# Altium PCB Control_Board_Model_C_Rigid_Flex_Flipped.PcbDoc (part 2 of 8)
Units mil, origin at the board's own origin, x right, y up, seen from the top; angles counter-clockwise.
Board outline 3417.32 x 2110.24 mil, 6 copper layers (1-Sig/GND, 2-Sig, 3-GND, 4-Sig/Pwr, 5-Sig, 6-Sig/GND), stack 39.291 mil thick; 418 components, 342 nets, 1601 pads, 44 vias.
Unrouted connection lines stored in the file: 13.
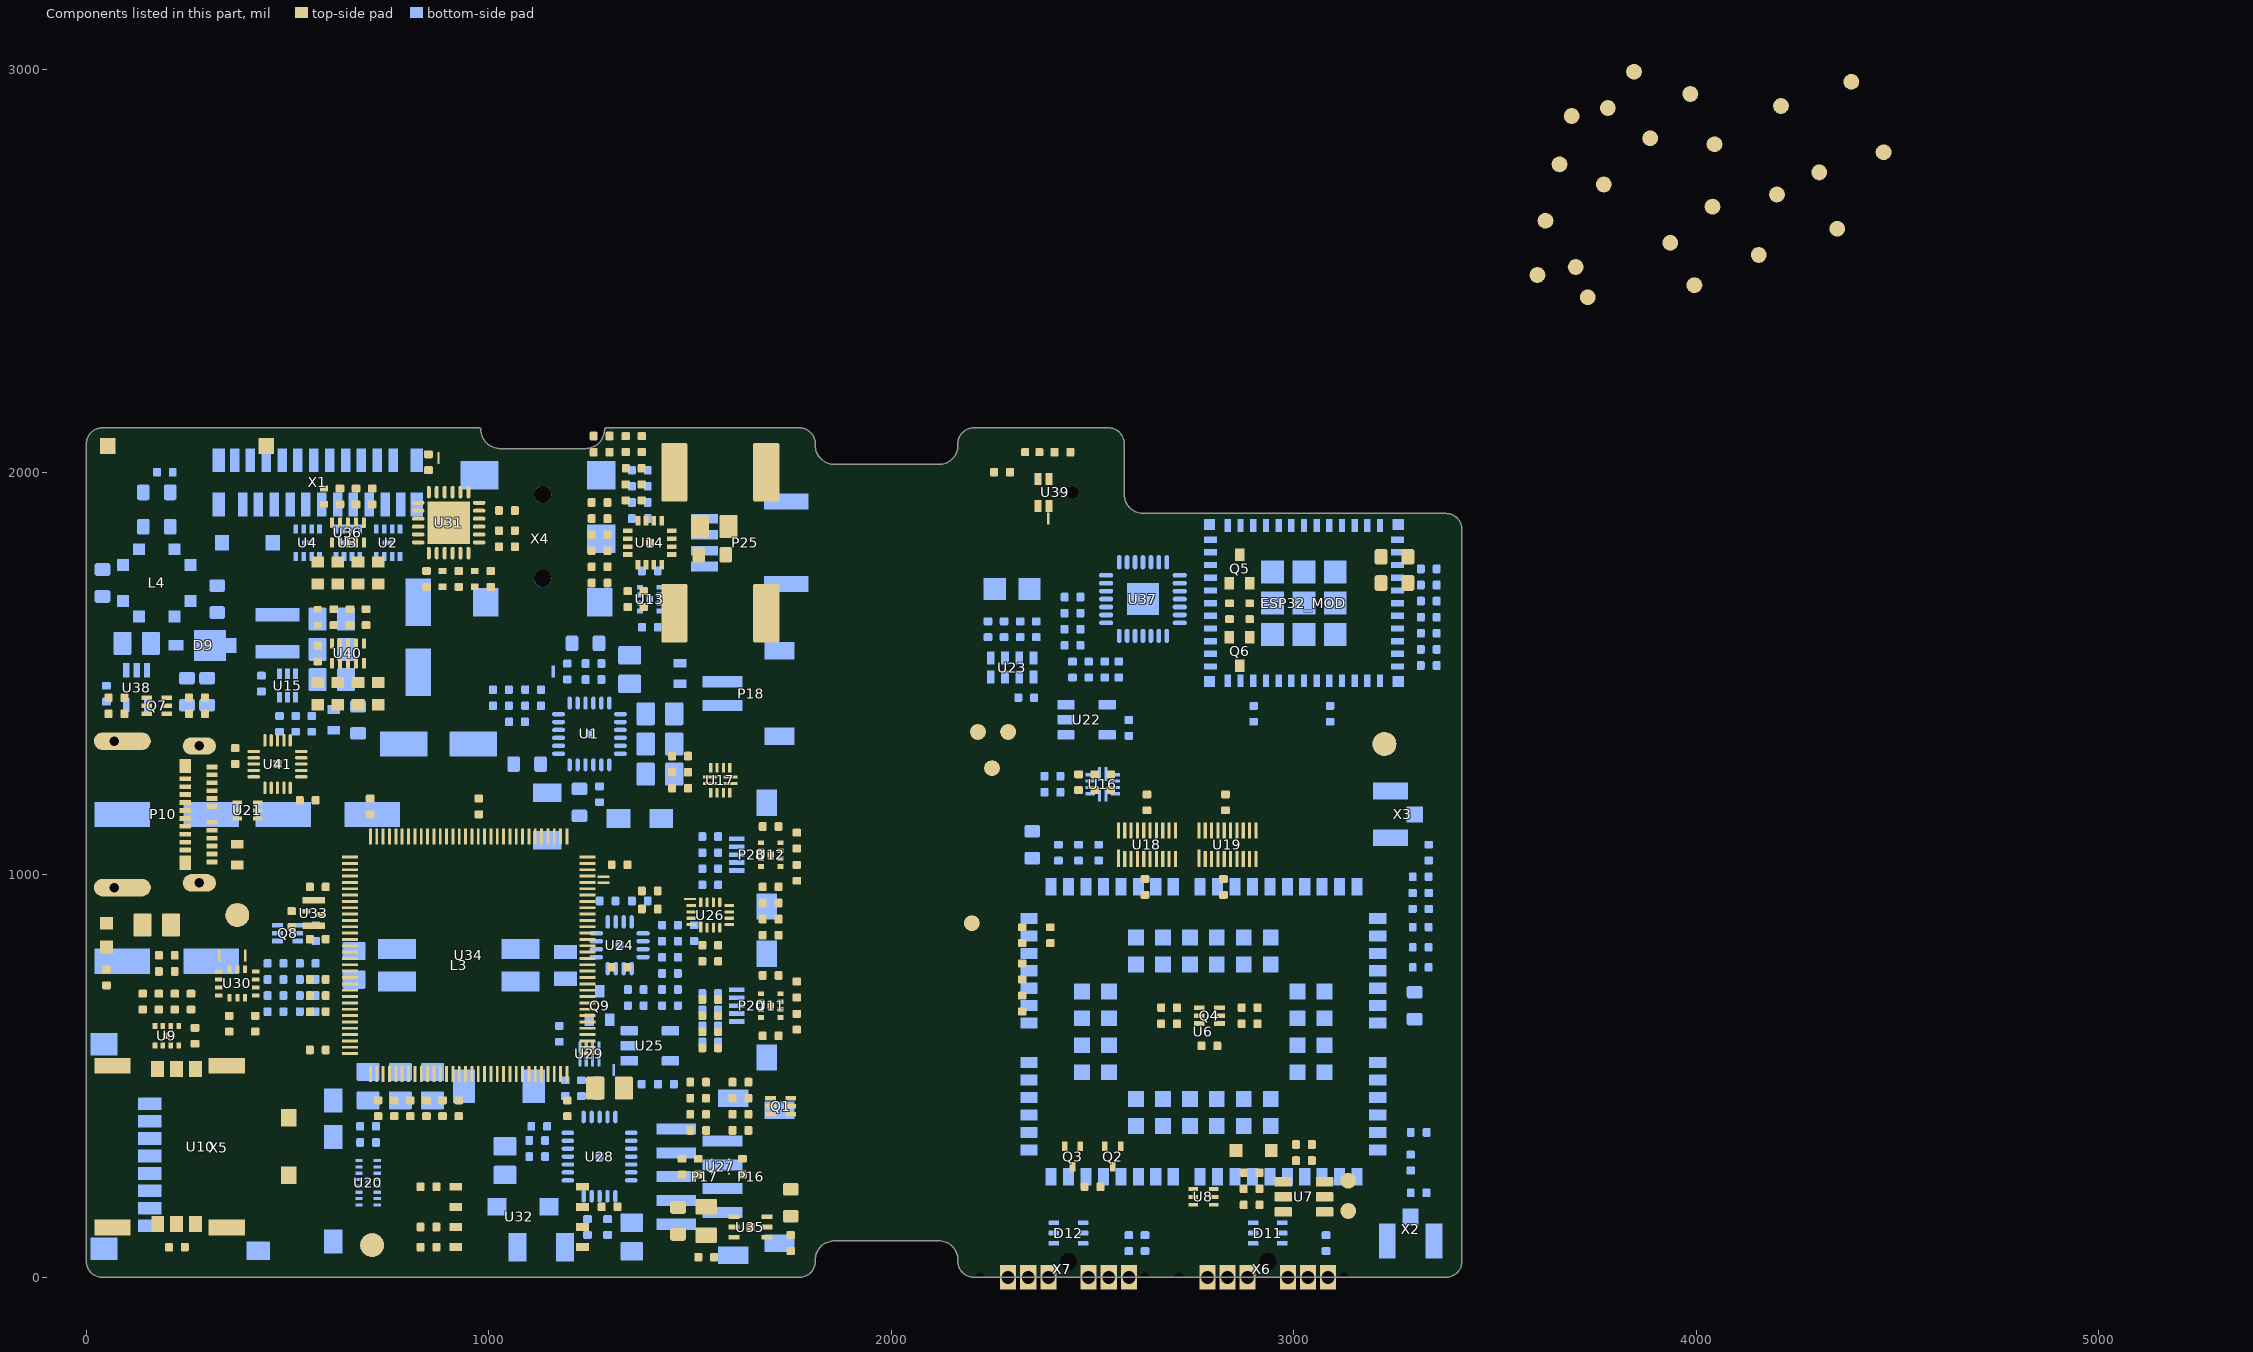
[diagram p6: the components of this part, seen from the top]

## Components (designator, comment, footprint, x,y, rotation, side; value= is the part's Value field where it differs from the comment) (continued)
R130 "RES SMD 1K OHM 1% 1/16W 0402" R0402 2450,1690 r0 bottom (schematic designator R3)
R131 "RES SMD 2.26 OHM 1% 1/10W 0603" R0603 250,1455 r90 bottom (schematic designator R1)
R132 "RES SMD 100 OHM 1% 1/16W 0402" 0402R 2275,2000 r0 top (schematic designator R61)
R133 "RES SMD 910K OHM 1% 1/16W 0402" R_0402 575,1640 r90 top (schematic designator R1)
R134 "RES SMD 390K OHM 1% 1/16W 0402" R0402 655,1640 r90 top (schematic designator R2)
R135 "RES SMD 88.7K OHM 1% 1/16W 0402" 0402R 615,1640 r90 top (schematic designator R3)
TP1 "Test Point Pad" Testpoint 3660,2765 r270 top (schematic designator TP3)
TP2 "Test Point Pad" Testpoint 3780,2905 r270 top (schematic designator TP4)
TP3 "Test Point Pad" Testpoint 3625,2625 r270 top (schematic designator TP5)
TP4 "Test Point Pad" Testpoint 3935,2570 r270 top (schematic designator TP6)
TP5 "Test Point Pad" Testpoint 3700,2510 r270 top (schematic designator TP7)
TP6 "Test Point Pad" TESTPOINT 3995,2465 r270 top (schematic designator TP8)
TP7 "Test Point Pad" TESTPOINT 2200,880 r270 top (schematic designator TP9)
TP8 "Test Point Pad" TESTPOINT 2290,1355 r270 top (schematic designator TP10)
TP9 "Test Point Pad" TESTPOINT 2215,1355 r270 top (schematic designator TP11)
TP10 "Test Point Pad" TESTPOINT 4040,2660 r270 top (schematic designator TP12)
TP11 "Test Point Pad" TESTPOINT 4155,2540 r270 top (schematic designator TP13)
TP12 "Test Point Pad" TESTPOINT 3770,2715 r270 top (schematic designator TP14)
TP13 "Test Point Pad" TESTPOINT 3690,2885 r270 top (schematic designator TP15)
TP14 "Test Point Pad" TESTPOINT 3985,2940 r270 top (schematic designator TP16)
TP15 "Test Point Pad" TESTPOINT 3605,2490 r270 top (schematic designator TP17)
TP16 "Test Point Pad" TESTPOINT 4200,2690 r270 top (schematic designator TP18)
TP17 "Test Point Pad" TESTPOINT 4465,2795 r270 top (schematic designator TP19)
TP18 "Test Point Pad" TESTPOINT 3885,2830 r270 top (schematic designator TP20)
TP19 "Test Point Pad" TESTPOINT 4305,2745 r270 top (schematic designator TP21)
TP20 "Test Point Pad" TESTPOINT 4045,2815 r270 top (schematic designator TP22)
TP21 "Test Point Pad" TESTPOINT 3845,2995 r270 top (schematic designator TP23)
TP22 "Test Point Pad" TESTPOINT 3730,2435 r270 top (schematic designator TP24)
TP23 "Test Point Pad" TESTPOINT 4385,2970 r270 top (schematic designator TP25)
TP24 "Test Point Pad" TESTPOINT 4350,2605 r270 top (schematic designator TP26)
TP25 "Test Point Pad" TESTPOINT 4210,2910 r270 top (schematic designator TP27)
TP26 "Test Point Pad" TESTPOINT 3135,240 r0 top (schematic designator TP1)
TP27 "Test Point Pad" TESTPOINT 3135,165 r0 top (schematic designator TP2)
TP28 "Test Point Pad" TESTPOINT 2250,1265 r270 top (schematic designator TP1)
U1 "BQ25611DRTWT" RTW0024 1250,1350 r0 bottom (schematic designator U2)
U2 "NUF4401MNT1G" DFN8 750,1825 r270 bottom (schematic designator U9)
U3 "NUF4401MNT1G" DFN8 650,1825 r270 bottom (schematic designator U10)
U4 "NUF4401MNT1G" DFN8 550,1825 r270 bottom (schematic designator U11)
U6 "BG95-M1" BG95 2775,610 r90 bottom value=BG95 (schematic designator U12)
U7 "USBLC6-2SC6" SOT-23-6 3025,200 r0 top (schematic designator U13)
U8 "ECMF02-2AMX6" QFN-6L 2775,200 r180 top (schematic designator U14)
U9 "TPD3F303DPVR" DPV8_1P7X0P4 200,600 r90 top (schematic designator U15)
U10 "1042240820" 1042240820_MOL 250,325 r270 top (schematic designator U16)
U11 "TPD3F303DPVR" DPV8_1P7X0P4 1700,675 r0 top (schematic designator U4)
U12 "TPD3F303DPVR" DPV8_1P7X0P4 1700,1050 r0 top (schematic designator U5)
U13 "TPD3F303DPVR" DPV8_1P7X0P4 1400,1685 r0 bottom (schematic designator U6)
U14 "STSPIN220" VFQFPN-16_STM 1400,1825 r90 top (schematic designator U1)
U15 "TPS61023DRLT" SOT50P160X60-6N 500,1470 r90 bottom (schematic designator U1)
U16 "TS3USB3031RMGR" RMG12_TEX 2525,1225 r270 bottom (schematic designator U1)
U17 "TS3USB3031RMGR" RMG12_TEX 1575,1235 r0 top (schematic designator U1)
U18 "TXB0108DQSR" DQS20_TEX 2635,1075 r90 top (schematic designator U9)
U19 "TXB0108DQSR" DQS20_TEX 2835,1075 r90 top (schematic designator U9)
U20 "EMIF06-MSD02N16" "QFN 3.5X1.2-16L" 700,235 r180 bottom (schematic designator U1)
U21 "ECMF02-2AMX6" QFN-6L 400,1160 r180 top (schematic designator U1)
U22 "24LC00T-I/OT" SOT-23-5 2485,1385 r0 bottom (schematic designator U1)
U23 "RV-3028-C7 32.768KHZ 1PPM-TA-QC" "8-SON (3.2X1.5)" 2300,1515 r90 bottom (schematic designator U1)
U24 "TPS55340RTET" RTE0016C 1325,825 r270 bottom (schematic designator U1)
U25 "OPA171AIDBVR" SOT-23-5 1400,575 r0 bottom (schematic designator U2)
U26 "TS3USBCA410IRSVT" RSV16_TEX 1550,900 r90 top (schematic designator U1)
U27 "LDLN025PU18R" DFN65P100X40-4N 1575,275 r180 top (schematic designator U1)
U28 "DRV10975ZRHFR" RHF24_2P65X3P65 1275,300 r0 bottom (schematic designator U1)
U29 "TXS0102DQMR" DQM8 1250,555 r270 bottom (schematic designator U1)
U30 "BMI270" XDCR_BMI270 375,730 r0 top (schematic designator U1)
U31 "CMX655DQ6" QFN50P400X400X100_HS-25N 900,1875 r90 top (schematic designator U7)
U32 "MT29F1G01ABAFDWB-IT:F TR" U-PDFN-8_8X6_P127 1075,150 r0 top (schematic designator U1)
U33 "IC SIT1533AI-H4-DCC-32.768E MEMS OSC XO 32.7680KHZ LVCMOS" XTAL4_SiT1533_SIT 565,905 r90 top (schematic designator U3)
U34 "STM32G473QET6" LPQFP-128 950,800 r0 top (schematic designator U1)
U35 "TPS22810DRVT" "WSON-6 065" 1650,125 r0 top (schematic designator U1)
U36 "TPSM82822SILR" SIL0010D 650,1850 r90 top (schematic designator U1)
U37 "CP2102N-A02-GQFN28R" QFN28_5X5 2625,1685 r90 bottom (schematic designator U1)
U38 "TPS61169DCKR" DCK0005A_L 125,1465 r270 bottom (schematic designator U1)
U39 "IM69D130V01XTSA1" MIC_IM69D130V01XTSA1 2423.23,1950 r90 top (schematic designator U8)
U40 "TPSM82822SILR" SIL0010D 650,1550 r90 top (schematic designator U1)
U41 "TPD6S300ARUKR" WQFN20_RUK_TEX 475,1275 r0 top (schematic designator U1)
X1 "KEYPAD-DISP" CONN_0525592253 575,1975 r180 bottom (schematic designator X2)
X2 "U.FL-R-SMT-1(10)" "CONN U.FL RCPT STR 50 OHM SMD" 3290,90 r180 bottom (schematic designator X3)
X3 "U.FL-R-SMT-1(10)" "CONN U.FL RCPT STR 50 OHM SMD" 3240,1150 r90 bottom (schematic designator X4)
X4 "SPO2" CUI_SJ2-25515A-SMT-TR 1133.86,1858.27 r270 bottom (schematic designator X1)
X5 "uSD Card" 5025700893 325,325 r270 bottom (schematic designator X1)
X6 "SWD" EC06-IDC 2935,0 r0 bottom (schematic designator X1)
X7 "DEBUG" EC06-IDC 2440,0 r0 bottom (schematic designator X1)
Y1 "CMS-151135-078S" SPKR_CMS-151135-078S 250,1790 r180 top

## Footprints (in the part's own frame and the unit in brackets; to place one, negate y for a bottom-side part, rotate by r counter-clockwise, add the part's x,y. Pads: shape width x height; smd on the part's side, far side on the other; paste and mask are expansions set on the pad)
"8-SON (3.2X1.5)" [mm] "8-WCDFN"
  rect 0.8x0.5 smd: 1(-0.6,1.35) 2(-0.6,0.45) 3(-0.6,-0.45) 4(-0.6,-1.35) 5(0.6,-1.35) 6(0.6,-0.45) 7(0.6,0.45) 8(0.6,1.35)
  silkscreen extent -1.33,1.71 -1.23,1.81, body extent -0.78,-1.63 0.77,1.63, height 0.8
0402R [mm]
  rrect35% 0.5x0.55 smd: 1(-0.5,0) 2(0.5,0)
  silkscreen extent -1,-0.51 1,0.5, body extent -0.53,-0.25 0.53,0.25, height 0.71
1042240820_MOL [mm]
  rect 1.1x1 smd: 11(-1.82,6.425) 12(1.82,6.425)
  rect 1x2.3 smd: G1(-5.1,-4.7) G2(-5.1,2.5) G3(5.1,2.5) G4(5.1,-4.7)
  rect 1x0.8 smd paste+0: S1(4.9,-1.85)
  rect 1x0.813 smd paste+0: S2(4.9,-0.65) S3(-4.9,-1.85) S4(4.9,0.55) S5(-4.9,-0.65) S6(-4.9,0.55)
  1-Sig/GND keep-out region: -0.6,-5.85 0.6,-5.85 0.6,-2.95 -0.6,-2.95
  1-Sig/GND keep-out region: 1.94,-5.85 3.14,-5.85 3.14,-2.95 1.94,-2.95
  1-Sig/GND keep-out region: -3.14,-5.85 -1.94,-5.85 -1.94,-2.95 -3.14,-2.95
  1-Sig/GND keep-out region: -0.6,1.45 0.6,1.45 0.6,4.55 -0.6,4.55
  1-Sig/GND keep-out region: 1.94,1.45 3.14,1.45 3.14,4.55 1.94,4.55
  1-Sig/GND keep-out region: -3.14,1.45 -1.94,1.45 -1.94,4.55 -3.14,4.55
  silkscreen extent -5.05,-3.21 6.1,6.33, body extent -5.18,-6.3 5.17,6.25, height 1.03
5025700893 [mm] "Card Connector Secure Digital - microSD™ Surface Mount, Right Angle Gold 10 (8 + 2) Position"
  rect 1.4x1.7 smd: 0(-6.45,7.15) 0(6.45,7.15)
  rect 1.5x1.15 smd: 0(-2.9,-7.325) 0(6,-7.325) 9(-0.6,-7.325)
  rect 0.8x1.5 smd: 1(-2.7,4.25) 2(-1.6,4.25) 3(-0.5,4.25) 4(0.6,4.25) 5(1.7,4.25) 6(2.8,4.25) 7(3.9,4.25) 8(5,4.25)
  rect 1.15x1.5 smd: 10(6.575,-2.6)
  1-Sig/GND keep-out region: 6.199,-0.65 6.699,-0.65 6.699,-1.6 6.199,-1.6
  1-Sig/GND keep-out region: 4,-5.15 6.9,-5.15 6.9,-6.55 4,-6.55
  1-Sig/GND keep-out region: 0.45,-6.95 1.35,-6.95 1.35,-7.45 0.45,-7.45
  silkscreen extent -7.15,-7.9 7.15,6, body extent -6.9,-7.65 6.9,7.85, height 1.8
BG95 [mm]
  rect 1.1x0.7 smd mask+0.05: 1(-9.15,9.7) 2(-9.15,8.6) 3(-9.15,7.5) 4(-9.15,6.4) 5(-9.15,5.3) 6(-9.15,4.2) 7(-9.15,3.1) 8(-9.15,2) 9(-9.15,0.9) 10(-9.15,-0.2) 11(-9.15,-1.9) 12(-9.15,-3) 13(-9.15,-4.1) 14(-9.15,-5.2) 15(-9.15,-6.3) 16(-9.15,-7.4) 17(-9.15,-8.5) 18(-9.15,-9.6) 32(9.15,-9.6) 33(9.15,-8.5) 34(9.15,-7.4) 35(9.15,-6.3) 36(9.15,-5.2) 37(9.15,-4.1) 38(9.15,-3) 39(9.15,-1.9) 40(9.15,-0.2) 41(9.15,0.9) 42(9.15,2) 43(9.15,3.1) 44(9.15,4.2) 45(9.15,5.3) 46(9.15,6.4) 47(9.15,7.5) 48(9.15,8.6) 49(9.15,9.7)
  rect 0.7x1.1 smd mask+0.05: 19(-7.45,-11) 20(-6.35,-11) 21(-5.25,-11) 22(-4.15,-11) 23(-3.05,-11) 24(-1.95,-11) 25(0.55,-11) 26(1.65,-11) 27(2.75,-11) 28(3.85,-11) 29(4.95,-11) 30(6.05,-11) 31(7.15,-11) 50(7.15,11) 51(6.05,11) 52(4.95,11) 53(3.85,11) 54(2.75,11) 55(1.65,11) 56(0.55,11) 57(-1.95,11) 58(-3.05,11) 59(-4.15,11) 60(-5.25,11) 61(-6.35,11) 62(-7.45,11)
  rect 1x1 smd mask+0.05: 63(-5.95,4.25) 64(-5.95,2.55) 65(-5.95,0.85) 66(-5.95,-0.85) 67(-5.95,-2.55) 68(-5.95,-4.25) 69(-2.55,-7.65) 70(-0.85,-7.65) 71(0.85,-7.65) 72(2.55,-7.65) 73(5.95,-4.25) 74(5.95,-2.55) 75(5.95,-0.85) 76(5.95,0.85) 77(5.95,2.55) 78(5.95,4.25) 79(2.55,7.65) 80(0.85,7.65) 81(-0.85,7.65) 82(-2.55,7.65) 83(-4.25,4.25) 84(-4.25,2.55) 85(-4.25,0.85) 86(-4.25,-0.85) 87(-4.25,-2.55) 88(-4.25,-4.25) 89(-2.55,-5.95) 90(-0.85,-5.95) 91(0.85,-5.95) 92(2.55,-5.95) 93(4.25,-4.25) 94(4.25,-2.55) 95(4.25,-0.85) 96(4.25,0.85) 97(4.25,2.55) 98(4.25,4.25) 99(2.55,5.95) 100(0.85,5.95) 101(-0.85,5.95) 102(-2.55,5.95)
  silkscreen extent -9.95,-11.8 9.95,11.8, body extent -10.02,-11.88 10.02,11.88, height 2.4
C0402 [mm]
  rrect35% 0.5x0.55 smd: 1(-0.5,0) 2(0.5,0)
  silkscreen extent -1,-0.5 1,0.5, body extent -0.53,-0.28 0.52,0.27, height 0.55
C0603 [mm]
  rrect35% 0.8x0.991 smd: 1(-0.85,0) 2(0.85,0)
  silkscreen extent -1.52,-0.75 1.52,0.75, body extent -0.88,-0.48 0.87,0.47, height 0.87
C0805 [mm]
  rrect15% 1.15x1.45 smd: 1(-0.9,0) 2(0.9,0)
  silkscreen extent -1.78,-0.94 1.77,0.94, body extent -1.1,-0.72 1.1,0.73, height 0.88
C1206 [mm]
  rect 1.15x1.8 smd: 1(-1.5,0) 2(1.5,0)
  silkscreen extent -2.51,-1.3 2.51,1.27, body extent -1.7,-0.89 1.7,0.91, height 1.75
CAP_0402 [mm]
  rect 0.4x0.5 smd: 1(-0.5,0) 2(0.5,0)
  silkscreen extent 0,-0.2 0,0.2, body extent -0.5,-0.25 0.5,0.25, height 0.5
CAPC1608X08N_0603 [mm] "Chip Capacitor, 2-Leads, Body 1.60x0.80mm, IPC Medium Density"
  rect 0.7x0.8 smd: 1(-0.7,0) 2(0.7,0)
  silkscreen extent 0,-0.38 0,0.38, body extent -0.87,-0.47 0.88,0.48, height 0.9
CAPC2012X14N [mm] "Chip Capacitor, 2-Leads, Body 2.00x1.25mm, IPC Medium Density"
  rect 0.9x1.45 smd: 1(-0.85,0) 2(0.85,0)
  body extent -1.07,-0.7 1.07,0.7, height 1.4
CAPCP3225X100N [mm]
  rect 1.4x1.4 smd: 1(-1.1,0) 2(1.1,0)
  silkscreen extent -1.6,-1.25 1.6,1.25, body extent -1.6,-1.25 1.6,1.25, height 1
"CONN U.FL RCPT STR 50 OHM SMD" [mm] "U.FL (UMCC) Connector Receptacle, Male Pin 50Ohm Surface Mount Solder"
  rect 1.05x2.2 smd: 1(-1.475,0) 3(1.475,0)
  rect 1x1.05 smd: 2(0,1.525)
  body extent -1.5,-1.55 1.5,1.55, height 1.25
CONN_0525592253 [mm] "22 Position FFC, FPC Connector Contacts, Vertical - 1 Sided 0.020\" (0.50mm) Surface Mount"
  rect 0.6x1.5 smd mask+0.05: 1(-5.25,-1.4) 2(-4.75,1.4) 3(-4.25,-1.4) 4(-3.75,1.4) 5(-3.25,-1.4) 6(-2.75,1.4) 7(-2.25,-1.4) 8(-1.75,1.4) 9(-1.25,-1.4) 10(-0.75,1.4) 11(-0.25,-1.4) 12(0.25,1.4) 13(0.75,-1.4) 14(1.25,1.4) 15(1.75,-1.4) 16(2.25,1.4) 17(2.75,-1.4) 18(3.25,1.4) 19(3.75,-1.4) 20(4.25,1.4) 21(4.75,-1.4) 22(5.25,1.4)
  rect 0.8x1.5 smd mask+0.05: S1(-6.25,-1.4) S1(-6.25,1.4) S2(6.25,-1.4) S2(6.25,1.4)
  silkscreen extent -8.5,-3.15 8.5,2, body extent -8.35,-1.65 8.35,1.85, height 3.9
CONN_0545500571 [mm] "5 Position FFC, FPC Connector Contacts, Top 0.020\" (0.50mm) Surface Mount, Right Angle"
  rect 1.65x1.3 smd mask+0.05: 0(-3.275,-0.4) 0(3.275,-0.4)
  rect 0.3x1 smd mask+0.05: 1(-1,1.5) 2(-0.5,1.5) 3(0,1.5) 4(0.5,1.5) 5(1,1.5)
  silkscreen extent -4.1,-2.3 4.1,2.1, body extent -3.85,-3.3 3.85,1.7, height 1.2
CONN_JST_S2B-ZR-SM4A-TF(LF)(SN) [mm] "Connector Header Surface Mount, Right Angle 2 position 0.059\" (1.50mm)"
  rect 0.7x2.5 smd: 1(-0.75,2.4) 2(0.75,2.4)
  rect 1.1x1.9 smd: S1(-2.7,-1.2) S2(2.7,-1.2)
  silkscreen extent -3.2,-3.1 3.2,3.9, body extent -3,-3.03 3,3.47, height 3.7
CONN_JST_S4B-ZR-SM4A-TF(LF)(SN) [mm]
  rect 0.7x2.5 smd: 1(-2.25,2.4) 2(-0.75,2.4) 3(0.75,2.4) 4(2.25,2.4)
  rect 1.1x1.9 smd: S1(-4.2,-1.2) S2(4.2,-1.2)
  silkscreen extent -4.6,-3.1 4.6,3.9, body extent -4.5,-3.03 4.5,3.47, height 3.7
CONN_JST_S5B-ZR-SM4A-TF(LF)(SN) [mm]
  rect 0.7x2.5 smd: 1(-3,2.4) 2(-1.5,2.4) 3(0,2.4) 4(1.5,2.4) 5(3,2.4)
  rect 1.1x1.9 smd: S1(-4.95,-1.2) S2(4.95,-1.2)
  silkscreen extent -5.4,-3.1 5.4,3.9, body extent -5.25,-3.03 5.25,3.47, height 3.7
CONN_JST_SM4B-NSHSS-TB(LF)(SN) [mm] "Connector Header Surface Mount, Right Angle 4 position 0.039\" (1.00mm)"
  rect 0.6x1.7 smd: 1(-1.5,2.9) 2(-0.5,2.9) 3(0.5,2.9) 4(1.5,2.9)
  rect 1x2.8 smd: S1(-2.6,-2.25) S2(2.6,-2.25)
  silkscreen extent -3.13,-3.5 3.13,4.1, body extent -3,-3.35 3,3.45, height 4.5
CUI_SJ2-25515A-SMT-TR [mm]
  rect 1.8x2.4 smd: 1(-3.4,4)
  rect 1.8x1.6 smd: 2(4.6,3.6) 3(4.6,-3.6)
  rect 1.8x1.8 smd: 4(0.6,-3.7) 5(-3.4,-3.7)
  round 1.1 hole 1.1 unplated: ""(-2.2,0) ""(3.1,0)
  silkscreen extent -7.9,-3.4 5.1,4.55, body extent -7.9,-4.1 5.1,4.7, height 4.05
DCK0005A_L [mm]
  rect 0.9x0.4 smd paste-0.025 mask+0.05: 1(-1.1,0.65) 2(-1.1,0) 3(-1.1,-0.65) 4(1.1,-0.65) 5(1.1,0.65)
  silkscreen extent -0.7,-1.2 0.7,1.2, body extent -1.05,-1 1.05,1, height 1
DFN8 [mm] "DFN8 2x2, 0.5P CASE 506AQ"
  rect 0.57x0.3 smd mask+0.05: 1(-0.865,0.75) 2(-0.865,0.25) 3(-0.865,-0.25) 4(-0.865,-0.75) 5(0.865,-0.75) 6(0.865,-0.25) 7(0.865,0.25) 8(0.865,0.75)
  rect 0.3x0.75 smd mask+0.05: GP(0,0)
  1-Sig/GND region: -0.376,0.7 0.374,0.7 0.374,-0.7 -0.376,-0.7
  silkscreen extent -1.02,-1.05 0.25,1.22, body extent -1,-1 1,1, height 1
DFN65P100X40-4N [mm] "DFN, 4-Leads, Body 1.00x1.00mm, Pitch 0.65mm, IPC Medium Density"
  rect 0.1x0.1 smd paste-0.2 mask-0.2: 1(-0.55,0.455) 2(-0.55,-0.455) 3(0.55,-0.455) 4(0.55,0.455) 5(0,0)
  1-Sig/GND region: 0,-0.323 0.323,0 0,0.323 -0.323,0
  1-Sig/GND region: -0.6,-0.505 -0.6,-0.205 -0.335,-0.205 -0.185,-0.355 -0.185,-0.505
  1-Sig/GND region: 0.6,0.505 0.6,0.205 0.335,0.205 0.185,0.355 0.185,0.505
  1-Sig/GND region: 0.6,-0.505 0.6,-0.205 0.335,-0.205 0.185,-0.355 0.185,-0.505
  1-Sig/GND region: -0.6,0.505 -0.6,0.205 -0.335,0.205 -0.185,0.355 -0.185,0.505
  silkscreen extent -0.55,0.75 -0.45,0.85, body extent -0.52,-0.53 0.53,0.53, height 0.4
DPV8_1P7X0P4 [mm]
  rect 0.38x0.3 smd paste+0 mask+0.05: 1(-0.61,0.75) 2(-0.61,0.25) 3(-0.61,-0.25) 4(-0.61,-0.75) 5(0.61,-0.75) 6(0.61,-0.25) 7(0.61,0.25) 8(0.61,0.75)
  rect 0.4x0.4 smd paste-0.837 mask+0.05: 9(0,0)
  1-Sig/GND region: -0.2,-0.85 0.2,-0.85 0.2,0.85 -0.2,0.85
  silkscreen extent -1.15,-1.2 0.8,1.2, body extent -0.8,-1.05 0.8,1.05, height 0.65
DQM8 [mm]
  rect 0.7x0.2 smd mask+0.05: 1(-0.45,0.6) 2(-0.45,0.2) 3(-0.45,-0.2) 4(-0.45,-0.6) 5(0.45,-0.6) 6(0.45,-0.2) 7(0.45,0.2) 8(0.45,0.6)
  silkscreen extent -1.05,0.95 -0.95,1.05, body extent -0.6,-0.9 0.6,0.9, height 0.5
DQS20_TEX [mm]
  rect 1.1x0.2 smd paste-0.1 mask+0.05: 1(-0.85,1.8)
  rect 1x0.2 smd paste-0.1 mask+0.05: 2(-0.9,1.4) 3(-0.9,1) 4(-0.9,0.6) 5(-0.9,0.2) 6(-0.9,-0.2) 7(-0.9,-0.6) 8(-0.9,-1) 9(-0.9,-1.4) 10(-0.9,-1.8) 11(0.9,-1.8) 12(0.9,-1.4) 13(0.9,-1) 14(0.9,-0.6) 15(0.9,-0.2) 16(0.9,0.2) 17(0.9,0.6) 18(0.9,1) 19(0.9,1.4) 20(0.9,1.8)
  silkscreen extent -1.45,-2.15 1,2.25, body extent -1.07,-2.02 1.07,2.02, height 0.55
EC06-IDC [mil] "6-pin Castellated Board-Edge Connectors"
  round 20 hole 43.31 unplated: 0(0,-39.37)
  rect 40x61.5 hole 32: 1(150,0) 2(100,0) 3(50,0) 4(-50,0) 5(-100,0) 6(-150,0)
  rect 10x10 hole 25 unplated: K1(190,0) K2(-220,0)
  body extent -256,-132 217,59
FIDUCIAL [mm]
  round 1.5 smd far side paste+0 mask+0.75: ""(0,0)
  round 1.5 smd paste+0 mask+0.75: ""(0,0)
  1-Sig/GND pour cut-out: 0,1.6 0.158,1.6 0.467,1.538 0.758,1.418 1.02,1.243 1.243,1.02 1.418,0.758 1.538,0.467 1.6,0.158 1.6,0 1.6,0 1.6,-0.158 1.538,-0.467 1.418,-0.758 1.243,-1.02 1.02,-1.243 0.758,-1.418 0.467,-1.539 0.158,-1.6 0,-1.6 -0.158,-1.6 -0.467,-1.538 -0.758,-1.418 -1.02,-1.243 -1.243,-1.02 -1.418,-0.758 -1.538,-0.467 -1.6,-0.158 -1.6,0 -1.6,0.158 -1.538,0.467 -1.418,0.758 -1.243,1.02 -1.02,1.243 -0.758,1.418 -0.467,1.538 -0.158,1.6 0,1.6
  6-Sig/GND pour cut-out: 0,1.6 0.158,1.6 0.467,1.538 0.758,1.418 1.02,1.243 1.243,1.02 1.418,0.758 1.538,0.467 1.6,0.158 1.6,0 1.6,-0.158 1.538,-0.467 1.418,-0.758 1.243,-1.02 1.02,-1.243 0.758,-1.418 0.467,-1.539 0.158,-1.6 0,-1.6 -0.158,-1.6 -0.467,-1.538 -0.758,-1.418 -1.02,-1.243 -1.243,-1.02 -1.418,-0.758 -1.538,-0.467 -1.6,-0.158 -1.6,0 -1.6,0.158 -1.538,0.467 -1.418,0.758 -1.243,1.02 -1.02,1.243 -0.758,1.418 -0.467,1.538 -0.158,1.6 0,1.6
  body extent -1.49,-1.5 1.5,1.5
IND_IHLP-1212B00 [mm] "1µH Shielded Molded Inductor 5A 24mOhm Max Nonstandard"
  rect 1.5x1.2 smd: 1(-1.35,0) 2(1.35,0)
  silkscreen extent -2,-1.73 2,1.73, body extent -1.8,-1.6 1.8,1.6, height 2.06
IND_LPD5030 [mm] "Shielded Coupled Inductors"
  rect 0.75x0.75 smd: 1(-2.125,1.125) 1(-1.125,2.125) 2(-2.125,-1.125) 2(-1.125,-2.125) 3(1.125,-2.125) 3(2.125,-1.125) 4(1.125,2.125) 4(2.125,1.125)
  1-Sig/GND region: -1.75,0.75 -2.5,0.75 -2.5,1.7 -1.7,2.5 -0.75,2.5 -0.75,1.75 -1.151,1.75 -1.75,1.151
  1-Sig/GND region: 0.75,1.75 0.75,2.5 1.7,2.5 2.5,1.7 2.5,0.75 1.75,0.75 1.75,1.151 1.151,1.75
  1-Sig/GND region: 1.75,-0.75 2.5,-0.75 2.5,-1.7 1.7,-2.5 0.75,-2.5 0.75,-1.75 1.151,-1.75 1.75,-1.151
  1-Sig/GND region: -0.75,-1.75 -0.75,-2.5 -1.7,-2.5 -2.5,-1.7 -2.5,-0.75 -1.75,-0.75 -1.75,-1.151 -1.151,-1.75
  silkscreen extent -2.8,-2.8 2.8,2.8, body extent -2.44,-2.44 2.44,2.44, height 2.98
IND_MSD1048H [mm] "Shielded Coupled Inductors"
  rect 2.4x1.25 smd: 1(-3.9,1.025) 2(-3.9,-1.025) 3(3.9,-1.025) 4(3.9,1.025)
  silkscreen extent -5.38,-5.38 5.38,5.38, body extent -5.15,-5.15 5.15,5.15, height 5.1
IND_WE_LQSH_3012 [mm] "FIXED IND 1UH 2.4A 54 MOHM MAX"
  rect 0.85x2.8 smd: 1(-1.175,0) 2(1.175,0)
  silkscreen extent -2,-1.8 2,1.8, body extent -1.5,-1.52 1.5,1.53, height 1.25
L0402 [mm]
  rrect35% 0.5x0.55 smd: 1(-0.5,0) 2(0.5,0)
  silkscreen extent -1,-0.51 1,0.5, body extent -0.53,-0.25 0.53,0.25, height 0.71
L0603 [mm]
  rrect35% 0.8x1 smd: 1(-0.85,0) 2(0.85,0)
  silkscreen extent -1.5,-0.75 1.5,0.75, body extent -0.8,-0.4 0.8,0.4, height 0.8
L_0402 [mm]
  rrect25% 0.5x0.5 smd: 1(-0.45,0) 2(0.45,0)
  silkscreen extent -0.13,-0.43 0.13,0.43, body extent -0.5,-0.25 0.5,0.25, height 0.5
LED_0603 [mm] "LED Indication - Discrete 0603"
  rect 0.8x0.8 smd: 1(-0.75,0) 2(0.75,0)
  silkscreen extent -1.15,0.75 -1.05,0.85, body extent -0.8,-0.4 0.8,0.4, height 0.55
LOGO_ACME_CPU [mil]
Logo_ESD [mil] "Silk only"
  silkscreen extent -131,-88 142,145
LPQFP-128 [mm]
  rect 1x0.18 smd mask+0.05: 1(-7.5,6.2) 2(-7.5,5.8) 3(-7.5,5.4) 4(-7.5,5) 5(-7.5,4.6) 6(-7.5,4.2) 7(-7.5,3.8) 8(-7.5,3.4) 9(-7.5,3) 10(-7.5,2.6) 11(-7.5,2.2) 12(-7.5,1.8) 13(-7.5,1.4) 14(-7.5,1) 15(-7.5,0.6) 16(-7.5,0.2) 17(-7.5,-0.2) 18(-7.5,-0.6) 19(-7.5,-1) 20(-7.5,-1.4) 21(-7.5,-1.8) 22(-7.5,-2.2) 23(-7.5,-2.6) 24(-7.5,-3) 25(-7.5,-3.4) 26(-7.5,-3.8) 27(-7.5,-4.2) 28(-7.5,-4.6) 29(-7.5,-5) 30(-7.5,-5.4) 31(-7.5,-5.8) 32(-7.5,-6.2) 65(7.5,-6.2) 66(7.5,-5.8) 67(7.5,-5.4) 68(7.5,-5) 69(7.5,-4.6) 70(7.5,-4.2) 71(7.5,-3.8) 72(7.5,-3.4) 73(7.5,-3) 74(7.5,-2.6) 75(7.5,-2.2) 76(7.5,-1.8) 77(7.5,-1.4) 78(7.5,-1) 79(7.5,-0.6) 80(7.5,-0.2) 81(7.5,0.2) 82(7.5,0.6) 83(7.5,1) 84(7.5,1.4) 85(7.5,1.8) 86(7.5,2.2) 87(7.5,2.6) 88(7.5,3) 89(7.5,3.4) 90(7.5,3.8) 91(7.5,4.2) 92(7.5,4.6) 93(7.5,5) 94(7.5,5.4) 95(7.5,5.8) 96(7.5,6.2)
  rect 0.18x1 smd mask+0.05: 33(-6.2,-7.5) 34(-5.8,-7.5) 35(-5.4,-7.5) 36(-5,-7.5) 37(-4.6,-7.5) 38(-4.2,-7.5) 39(-3.8,-7.5) 40(-3.4,-7.5) 41(-3,-7.5) 42(-2.6,-7.5) 43(-2.2,-7.5) 44(-1.8,-7.5) 45(-1.4,-7.5) 46(-1,-7.5) 47(-0.6,-7.5) 48(-0.2,-7.5) 49(0.2,-7.5) 50(0.6,-7.5) 51(1,-7.5) 52(1.4,-7.5) 53(1.8,-7.5) 54(2.2,-7.5) 55(2.6,-7.5) 56(3,-7.5) 57(3.4,-7.5) 58(3.8,-7.5) 59(4.2,-7.5) 60(4.6,-7.5) 61(5,-7.5) 62(5.4,-7.5) 63(5.8,-7.5) 64(6.2,-7.5) 97(6.2,7.5) 98(5.8,7.5) 99(5.4,7.5) 100(5,7.5) 101(4.6,7.5) 102(4.2,7.5) 103(3.8,7.5) 104(3.4,7.5) 105(3,7.5) 106(2.6,7.5) 107(2.2,7.5) 108(1.8,7.5) 109(1.4,7.5) 110(1,7.5) 111(0.6,7.5) 112(0.2,7.5) 113(-0.2,7.5) 114(-0.6,7.5) 115(-1,7.5) 116(-1.4,7.5) 117(-1.8,7.5) 118(-2.2,7.5) 119(-2.6,7.5) 120(-3,7.5) 121(-3.4,7.5) 122(-3.8,7.5) 123(-4.2,7.5) 124(-4.6,7.5) 125(-5,7.5) 126(-5.4,7.5) 127(-5.8,7.5) 128(-6.2,7.5)
  silkscreen extent -8.86,-8.86 8.86,8.86, body extent -8,-8 8,8, height 1.6
MIC_IM69D130V01XTSA1 [mm]
  rect 0.75x0.45 smd paste-1: 1(0.85,1.5) 2(0.85,0.8) 3(-0.85,1.5) 4(-0.85,0.8)
  rect 0.1x0.1 smd paste-1 mask+0: 5(0,0.12)
  round 0.8 hole 0.8 unplated: ""(0,-0.68)
  1-Sig/GND region: 248 vertices and 0 holes, not listed, extent -1.03,-1.71 1.03,0.35
  silkscreen extent -1.54,-2 2,2.04, body extent -1.5,-2 1.5,2, height 1.3
MODULE_ESP32-C3-MINI-1 [mm]
  rect 0.8x0.4 smd: 1(-5.9,4) 2(-5.9,3.2) 3(-5.9,2.4) 4(-5.9,1.6) 5(-5.9,0.8) 6(-5.9,0) 7(-5.9,-0.8) 8(-5.9,-1.6) 9(-5.9,-2.4) 10(-5.9,-3.2) 11(-5.9,-4) 25(5.9,-4) 26(5.9,-3.2) 27(5.9,-2.4) 28(5.9,-1.6) 29(5.9,-0.8) 30(5.9,0) 31(5.9,0.8) 32(5.9,1.6) 33(5.9,2.4) 34(5.9,3.2) 35(5.9,4)
  rect 0.4x0.8 smd: 12(-4.8,-4.9) 13(-4,-4.9) 14(-3.2,-4.9) 15(-2.4,-4.9) 16(-1.6,-4.9) 17(-0.8,-4.9) 18(0,-4.9) 19(0.8,-4.9) 20(1.6,-4.9) 21(2.4,-4.9) 22(3.2,-4.9) 23(4,-4.9) 24(4.8,-4.9) 36(4.8,4.9) 37(4,4.9) 38(3.2,4.9) 39(2.4,4.9) 40(1.6,4.9) 41(0.8,4.9) 42(0,4.9) 43(-0.8,4.9) 44(-1.6,4.9) 45(-2.4,4.9) 46(-3.2,4.9) 47(-4,4.9) 48(-4.8,4.9)
  rect 1.45x1.45 smd: 49(-1.975,-1.975) 49(-1.975,0) 49(-1.975,1.975) 49(0,-1.975) 49(0,0) 49(0,1.975) 49(1.975,-1.975) 49(1.975,0) 49(1.975,1.975)
  rect 0.7x0.7 smd: 50(5.95,4.95) 51(5.95,-4.95) 52(-5.95,-4.95) 53(-5.95,4.95)
  silkscreen extent -7.2,3.9 -7,4.1, body extent -6.6,-5.6 6.6,11, height 2.4
MOLEX_2012670005 [mm] "USB-C (USB TYPE-C) USB 3.2 Gen 2 (USB 3.1 Gen 2, Superspeed + (USB 3.1)) Receptacle Connector 24 Position Surface Mount, Right Angle; Through Hole"
  rect 0.3x0.7 smd: A1(-3,3.97) A2(-2.5,3.97) A3(-2,3.97) A4(-1.5,3.97) A5(-1,3.97) A6(-0.5,3.97) A7(0.5,3.97) A8(1,3.97) A9(1.5,3.97) A10(2,3.97) A11(2.5,3.97) A12(3,3.97) B2(2.25,2.27) B3(1.75,2.27) B4(1.25,2.27) B5(0.75,2.27) B6(0.25,2.27) B7(-0.25,2.27) B8(-0.75,2.27) B9(-1.25,2.27) B10(-1.75,2.27) B11(-2.25,2.27)
  rect 0.9x0.7 smd: B1(3.05,2.27) B12(-3.05,2.27)
  oval 1.1x2.1 hole 0.6 slot 1.6 at 90 deg: S1(-4.32,3.16) S2(4.32,3.16)
  oval 1.1x3.6 hole 0.6 slot 2.1 at 90 deg copper offset 0,0.5: S3(-4.62,-2.2) S4(4.62,-2.2)
  body extent -4.7,-4.15 4.69,4.15, height 3.72
"Net Tie 6x30mil" [mil]
  rect 16x6 smd paste-5 mask-5: 1(-7,0) 2(7,0)
"NET TIE 6X30MIL" [mil]
  rect 16x6 smd paste-5 mask-5: 1(-7,0) 2(7,0)
"Net Tie 8x30mil" [mil]
  rect 16x8 smd paste-5 mask-5: 1(-7,0) 2(7,0)
QFN28_5X5 [mm]
  rrect100% 0.9x0.3 smd paste+0 mask+0.05: 1(-2.324,1.5) 2(-2.324,1) 3(-2.324,0.5) 4(-2.324,0) 5(-2.324,-0.5) 6(-2.324,-1) 7(-2.324,-1.5) 15(2.324,-1.5) 16(2.324,-1) 17(2.324,-0.5) 18(2.324,0) 19(2.324,0.5) 20(2.324,1) 21(2.324,1.5)
  rrect100% 0.3x0.9 smd paste+0 mask+0.05: 8(-1.5,-2.324) 9(-1,-2.324) 10(-0.5,-2.324) 11(0,-2.324) 12(0.5,-2.324) 13(1,-2.324) 14(1.5,-2.324) 22(1.5,2.324) 23(1,2.324) 24(0.5,2.324) 25(0,2.324) 26(-0.5,2.324) 27(-1,2.324) 28(-1.5,2.324)
  rect 2x2 smd paste-2 mask+0.05: 29(0,0)
  1-Sig/GND region: -1.675,1.675 1.675,1.675 1.675,-1.675 -1.675,-1.675
  silkscreen extent -2.63,-2.63 2.63,2.63, body extent -2.55,-2.55 2.55,2.55, height 0.94
QFN50P400X400X100_HS-25N [mm] "QFN, 24-Leads, Body 4.00x4.00mm, Pitch 0.50mm, Thermal Pad 2.68x2.68mm, IPC Medium Density"
  oval 0.8x0.25 smd: 1(-1.925,1.25) 2(-1.925,0.75) 3(-1.925,0.25) 4(-1.925,-0.25) 5(-1.925,-0.75) 6(-1.925,-1.25) 13(1.925,-1.25) 14(1.925,-0.75) 15(1.925,-0.25) 16(1.925,0.25) 17(1.925,0.75) 18(1.925,1.25)
  oval 0.25x0.8 smd: 7(-1.25,-1.925) 8(-0.75,-1.925) 9(-0.25,-1.925) 10(0.25,-1.925) 11(0.75,-1.925) 12(1.25,-1.925) 19(1.25,1.925) 20(0.75,1.925) 21(0.25,1.925) 22(-0.25,1.925) 23(-0.75,1.925) 24(-1.25,1.925)
  rect 2.68x2.68 smd: 25(0,0)
  silkscreen extent -2.92,-2.15 2.15,2.15, body extent -2.05,-2.05 2.05,2.05, height 1
"QFN 3.5X1.2-16L" [mm] "Micro QFN 3.5x1.2-16L footprint"
  rect 0.45x0.2 smd mask+0.05: 1(-0.575,1.4) 2(-0.575,1) 3(-0.575,0.6) 4(-0.575,0.2) 5(-0.575,-0.2) 6(-0.575,-0.6) 7(-0.575,-1) 8(-0.575,-1.4) 9(0.575,-1.4) 10(0.575,-1) 11(0.575,-0.6) 12(0.575,-0.2) 13(0.575,0.2) 14(0.575,0.6) 15(0.575,1) 16(0.575,1.4)
  rect 0.3x0.3 smd mask+0.05: 17(0,0)
  1-Sig/GND region: -0.15,1.4 0.15,1.4 0.15,-1.4 -0.15,-1.4
  silkscreen extent -1.33,-1.88 0.63,1.88, body extent -0.63,-1.77 0.62,1.77, height 0.55
QFN-6L [mm]
  rect 0.6x0.25 smd: 1(-0.65,0.5) 2(-0.65,0) 3(-0.65,-0.5) 4(0.65,-0.5) 5(0.65,0) 6(0.65,0.5)
  silkscreen extent -1.38,-1.03 0.92,1.07, body extent -0.77,-0.88 0.77,0.87, height 0.55
R0402 [mm]
  rrect35% 0.5x0.55 smd: 1(-0.5,0) 2(0.5,0)
  silkscreen extent -1,-0.51 1,0.5, body extent -0.53,-0.25 0.53,0.25, height 0.71
R0603 [mm]
  rrect35% 0.8x0.991 smd: 1(-0.85,0) 2(0.85,0)
  silkscreen extent -1.5,-0.75 1.5,0.75, body extent -0.8,-0.41 0.8,0.41, height 0.71
R0805 [mm]
  rrect20% 1x1.35 smd: 1(-0.9,0) 2(0.9,0)
  silkscreen extent -1.7,-1 1.7,1, body extent -1.05,-0.68 1.05,0.68, height 0.6
R1206 [mm]
  rect 1.15x1.8 smd: 1(-1.5,0) 2(1.5,0)
  silkscreen extent -2.54,-1.27 2.54,1.27, body extent -1.55,-0.8 1.55,0.8, height 0.65
R2512 [mm] "RES 2512"
  rrect10% 1.65x3.68 smd: 1(-2.9,0) 2(2.9,0)
  silkscreen extent -1.27,-1.78 1.27,1.78, body extent -3.15,-1.6 3.15,1.6, height 0.71
R_0402 [mm]
  rect 0.4x0.5 smd: 1(-0.5,0) 2(0.5,0)
  silkscreen extent 0,-0.2 0,0.2, body extent -0.5,-0.25 0.5,0.25, height 0.4
RHF24_2P65X3P65 [mm] "Plastic Quad Flatpack No-Lead"
  rrect100% 0.8x0.28 smd mask+0.05: 1(-2,1.5) 2(-2,1) 3(-2,0.5) 4(-2,0) 5(-2,-0.5) 6(-2,-1) 7(-2,-1.5) 13(2,-1.5) 14(2,-1) 15(2,-0.5) 16(2,0) 17(2,0.5) 18(2,1) 19(2,1.5)
  rrect100% 0.28x0.8 smd mask+0.05: 8(-1,-2.5) 9(-0.5,-2.5) 10(0,-2.5) 11(0.5,-2.5) 12(1,-2.5) 20(1,2.5) 21(0.5,2.5) 22(0,2.5) 23(-0.5,2.5) 24(-1,2.5)
  rect 0.5x0.5 smd paste-2 mask+0: 25(0,0)
  1-Sig/GND region: -1.325,1.825 1.325,1.825 1.325,-1.825 -1.325,-1.825
  silkscreen extent -2.89,-2.7 2.2,2.7, body extent -2.13,-2.63 2.13,2.63, height 1
RMG12_TEX [mm]
  rect 0.9x0.2 smd mask+0.05: 1(-0.65,0.2) 2(-0.65,-0.2) 7(0.65,-0.2) 8(0.65,0.2)
  rect 0.2x0.6 smd mask+0.05: 3(-0.6,-0.8) 4(-0.2,-0.8) 5(0.2,-0.8) 6(0.6,-0.8) 9(0.6,0.8) 10(0.2,0.8) 11(-0.2,0.8) 12(-0.6,0.8)
  silkscreen extent -1.6,-0.95 1.1,0.95, body extent -0.95,-0.95 0.95,0.95, height 0.81
RSV16_TEX [mm]
  rrect50% 0.7x0.2 smd paste+0 mask+0.05: 1(-0.75,0.6)
  rrect50% 0.6x0.2 smd paste+0 mask+0.05: 2(-0.8,0.2) 3(-0.8,-0.2) 4(-0.8,-0.6) 9(0.8,-0.6) 10(0.8,-0.2) 11(0.8,0.2) 12(0.8,0.6)
  rrect50% 0.2x0.6 smd paste+0 mask+0.05: 5(-0.6,-1.2) 6(-0.2,-1.2) 7(0.2,-1.2) 8(0.6,-1.2) 13(0.6,1.2) 14(0.2,1.2) 15(-0.2,1.2) 16(-0.6,1.2)
  silkscreen extent -1.3,-1.58 1.18,1.58, body extent -0.97,-1.37 0.97,1.37, height 0.55
RTE0016C [mm]
  rrect100% 0.85x0.28 smd paste-0.025 mask+0.05: 1(-1.475,0.75) 2(-1.475,0.25) 3(-1.475,-0.25) 4(-1.475,-0.75) 9(1.475,-0.75) 10(1.475,-0.25) 11(1.475,0.25) 12(1.475,0.75)
  rrect100% 0.28x0.85 smd paste-0.025 mask+0.05: 5(-0.75,-1.475) 6(-0.25,-1.475) 7(0.25,-1.475) 8(0.75,-1.475) 13(0.75,1.475) 14(0.25,1.475) 15(-0.25,1.475) 16(-0.75,1.475)
  rect 0.5x0.5 smd paste-2 mask+0.05: 17(0,0)
  1-Sig/GND region: -0.85,0.85 0.85,0.85 0.85,-0.85 -0.85,-0.85
  silkscreen extent -2.2,-1.72 1.72,1.73, body extent -1.5,-1.5 1.5,1.5, height 0.8
RTW0024 [mm] "WQFN24 Plastic Quad Flatpack No-Lead"
  rrect100% 0.82x0.28 smd paste-0.025 mask+0.05: 1(-1.95,1.25) 2(-1.95,0.75) 3(-1.95,0.25) 4(-1.95,-0.25) 5(-1.95,-0.75) 6(-1.95,-1.25) 13(1.95,-1.25) 14(1.95,-0.75) 15(1.95,-0.25) 16(1.95,0.25) 17(1.95,0.75) 18(1.95,1.25)
  rrect100% 0.28x0.82 smd paste-0.025 mask+0.05: 7(-1.25,-1.95) 8(-0.75,-1.95) 9(-0.25,-1.95) 10(0.25,-1.95) 11(0.75,-1.95) 12(1.25,-1.95) 19(1.25,1.95) 20(0.75,1.95) 21(0.25,1.95) 22(-0.25,1.95) 23(-0.75,1.95) 24(-1.25,1.95)
  rect 0.5x0.5 smd paste-5 mask+0.05: 25(0,0)
  1-Sig/GND region: -1.35,1.35 1.35,1.35 1.35,-1.35 -1.35,-1.35
  silkscreen extent -2.6,-2 2,2, body extent -2,-2 2,2, height 0.8
SIGNAL-1 [mil]
  1-Sig/GND region: 88.58,0 93.5,0 93.5,93.5 88.58,93.5
  1-Sig/GND region: 0,4.92 0,-35 93.5,-35 93.5,4.92
  1-Sig/GND region: 93.5,93.5 88.58,93.5 88.58,0 93.5,0
  1-Sig/GND region: 93.5,88.58 93.5,93.5 0,93.5 0,88.58
  1-Sig/GND region: 0,0 4.92,0 4.92,93.5 0,93.5
  1-Sig/GND pour cut-out: -4.92,98.43 -4.92,-4.92 541.34,-4.92 541.34,98.42
SIGNAL-4 [mil]
  2-Sig region: 354.33,0 359.25,0 359.25,93.5 354.33,93.5
  2-Sig region: 359.25,88.58 359.25,93.5 265.75,93.5 265.75,88.58
  2-Sig region: 359.25,93.5 354.33,93.5 354.33,0 359.25,0
  2-Sig region: 0,4.92 0,-35 359.25,-35 359.25,4.92
  2-Sig region: 270.67,93.5 265.75,93.5 265.75,0 270.67,0
  2-Sig pour cut-out: -4.92,98.43 -4.92,-4.92 541.34,-4.92 541.34,98.43
SIGNAL-5 [mil]
  3-GND region: 359.25,93.5 354.33,93.5 354.33,0 359.25,0
  3-GND region: 0,4.92 0,-35 447.84,-35 447.84,4.92
  3-GND region: 447.83,93.5 442.91,93.5 442.91,0 447.83,0
  3-GND region: 447.83,88.58 447.83,93.5 354.33,93.5 354.33,88.58
  3-GND region: 442.91,0 447.83,0 447.83,93.5 442.91,93.5
  3-GND pour cut-out: -4.92,98.43 -4.92,-4.92 541.34,-4.92 541.34,98.43
SIGNAL-6 [mil]
  1-Sig/GND region: 531.5,0 536.42,0 536.42,-93.5 531.5,-93.5
  1-Sig/GND region: 442.91,0 447.83,0 447.83,-93.5 442.91,-93.5
  1-Sig/GND region: 536.42,-88.58 536.42,-93.5 442.91,-93.5 442.91,-88.58
  1-Sig/GND region: 536.42,-93.5 531.5,-93.5 531.5,0 536.42,0
  1-Sig/GND region: 0,-4.92 0,35 536.42,35 536.42,-4.92
  1-Sig/GND pour cut-out: -4.92,-98.43 -4.92,4.92 541.34,4.92 541.34,-98.43
SIL0010D [mm]
  rrect35% 0.65x0.25 smd mask+0.05: 1(-0.625,1) 2(-0.625,0.5) 3(-0.625,0) 4(-0.625,-0.5) 5(-0.625,-1) 6(0.625,-1) 7(0.625,-0.5) 8(0.625,0) 9(0.625,0.5) 10(0.625,1)
  silkscreen extent -1.53,1.41 -1.34,1.61, body extent -1,-1.25 1,1.25, height 1.1
SOD-123 [mm]
  rect 0.9x0.95 smd: 1(-1.6,0) 2(1.6,0)
  silkscreen extent -1.87,0.7 -1.77,0.8, body extent -1.82,-0.77 1.83,0.78, height 1.15
SOD-123FL [mm]
  rect 1.2x1.1 smd: 1(-1.651,0) 2(1.651,0)
  silkscreen extent -2.05,0.95 -1.95,1.05, body extent -1.92,-0.95 1.93,0.95, height 1.35
SOD-128 [mm] "SOD-128"
  rect 1.4x2.1 smd: 1(-2.2,0) 2(2.2,0)
  silkscreen extent -2.64,1.42 -2.44,1.62, body extent -2.35,-1.35 2.35,1.35, height 1
SOD-323F [mm]
  rect 0.8x0.8 smd: 1(-1.115,0) 2(1.115,0)
  silkscreen extent -1.5,0.79 -1.3,0.99, body extent -1.25,-0.65 1.25,0.65, height 1
SODFL100X40-2N [mm] "SODFL, 2-Leads, Body 0.60x1.00mm, IPC Medium Density"
  rect 0.36x0.25 smd: 1(-0.42,0) 2(0.42,0)
  silkscreen extent -0.56,0.33 -0.46,0.43, body extent -0.5,-0.32 0.5,0.33, height 0.4
SODFL375X95-2N [mm] "SODFL, 2-Leads, Body 1.90x3.75mm, IPC Medium Density"
  rect 0.7x0.95 smd: 1(-1.75,0)
  rect 2x1.95 smd: 1(-0.432,0)
  rect 0.95x0.65 smd: 2(1.7,0)
  silkscreen extent -2,0.92 -1.81,1.12, body extent -1.87,-1.02 1.87,1.03, height 0.95
SON_400UV-7_DIO [mm]
  rect 0.67x0.3 smd: 1(-0.64,0.5) 2(-0.64,0) 3(-0.64,-0.5) 4(0.64,-0.5) 5(0.64,0) 6(0.64,0.5)
  silkscreen extent -1.19,-0.98 0.75,1.07, body extent -0.8,-0.8 0.8,0.8, height 0.5
SOT50P160X60-6N [mm]
  rect 0.66x0.31 smd: 1(-0.735,0.5) 2(-0.735,0) 3(-0.735,-0.5) 4(0.735,-0.5) 5(0.735,0) 6(0.735,0.5)
  silkscreen extent -1.07,-0.97 0.6,1.07, body extent -0.8,-0.8 0.8,0.8, height 0.6
SOT363_SOP65P210X265-6N [mm] "SOP, 6-Leads, Body 2.00x1.25mm, Pitch 0.65mm, IPC Medium Density"
  rrect30% 0.66x0.3 smd mask+0.05: 1(-0.92,0.65) 2(-0.92,0) 3(-0.92,-0.65) 4(0.92,-0.65) 5(0.92,0) 6(0.92,0.65)
  silkscreen extent -1.1,-1.1 0.2,1.35, body extent -1.1,-1.1 1.1,1.1, height 1.1
SOT-23-5 [mm]
  rrect20% 1.1x0.6 smd mask+0.05: 1(-1.3,0.95) 2(-1.3,0) 3(-1.3,-0.95) 4(1.3,-0.95) 5(1.3,0.95)
  silkscreen extent -1.55,-1.4 0.4,1.65, body extent -1.4,-1.5 1.4,1.5, height 1.25
SOT-23-6 [mm]
  rrect20% 1.1x0.6 smd mask+0.05: 1(-1.3,0.95) 2(-1.3,0) 3(-1.3,-0.95) 4(1.3,-0.95) 5(1.3,0) 6(1.3,0.95)
  silkscreen extent -1.55,-1.5 0.5,1.65, body extent -1.4,-1.5 1.4,1.5, height 1.25
SOT-323 [mm]
  rect 0.8x0.6 smd: 1(-0.9,0.65) 2(-0.9,-0.65) 3(0.9,0)
  body extent -1.05,-1.07 1.05,1.08, height 1.05
SOT-416FL_ONS [mm]
  rect 0.6x0.356 smd: 1(-0.65,0.495) 2(-0.65,-0.495) 3(0.65,0)
  silkscreen extent -0.75,-0.95 0.57,1.05, body extent -0.85,-0.83 0.85,0.83, height 0.89
SPKR_CMS-151135-078S [mm]
  rect 1x1 smd paste-1 mask+0: M(-5,-6.99) P(5,-6.99)
  1-Sig/GND region: -3.9,-6.14 -3.9,-7.7 -5.9,-7.7 -5.9,-5.3 -4.74,-5.3
  1-Sig/GND region: 5.9,-7.7 3.9,-7.7 3.9,-6.14 4.74,-5.3 5.9,-5.3
  1-Sig/GND lines w0: -3.9,-6.14 -4.74,-5.3 -5.9,-5.3 -5.9,-7.7 -3.9,-7.7 -3.9,-6.14
  silkscreen extent -5.5,-7.5 5.5,7.5, body extent -5.5,-7.49 5.5,7.51, height 4.5
ST_QFN_1610 [mm] "2-UDFN"
  rect 0.55x0.8 smd: 1(-0.65,0) 2(0.65,0)
  silkscreen extent -0.95,0.75 -0.85,0.85, body extent -0.85,-0.55 0.85,0.55, height 0.6
Testpoint [mm] "Test Point"
  round 1 smd paste-0.508 mask-0.025: 1(0,0)
  body extent -0.5,-0.5 0.5,0.5
TESTPOINT [mm] "Test Point"
  round 1 smd paste-0.508 mask-0.025: 1(0,0)
  body extent -0.5,-0.5 0.5,0.5
U-PDFN-8_8X6_P127 [mm]
  rect 0.8x0.5 smd mask+0.05: 1(-4,1.905) 2(-4,0.635) 3(-4,-0.635) 4(-4,-1.905) 5(4,-1.905) 6(4,-0.635) 7(4,0.635) 8(4,1.905)
  silkscreen extent -4.7,-3.1 4.1,3.1, body extent -4.08,-3.05 4.09,3.05, height 0.55
VFQFPN-16_STM [mm]
  rect 0.6x0.3 smd mask+0.05: 1(-1.385,0.75) 2(-1.385,0.25) 3(-1.385,-0.25) 4(-1.385,-0.75) 9(1.385,-0.75) 10(1.385,-0.25) 11(1.385,0.25) 12(1.385,0.75)
  rect 0.3x0.6 smd mask+0.05: 5(-0.75,-1.385) 6(-0.25,-1.385) 7(0.25,-1.385) 8(0.75,-1.385) 13(0.75,1.385) 14(0.25,1.385) 15(-0.25,1.385) 16(-0.75,1.385)
  rect 0.5x0.5 smd mask+0.05: 17(0,0)
  1-Sig/GND region: -0.9,-0.9 0.9,-0.9 0.9,0.9 -0.9,0.9
  silkscreen extent -2.22,-1.7 1.7,1.7, body extent -1.57,-1.57 1.58,1.58, height 0.94
WCAP-ASLI_5X5.5 [mm] "Aluminium Electrolytic V-Chip SMT Capacitors, 5x5.5mm"
  rect 3x1.6 smd: 1(-2.2,0) 2(2.2,0)
  silkscreen extent -2.75,-2.75 2.75,2.75, body extent -3,-2.65 3,2.65, height 5.5
WCAP-ASLI_6.3X5.5 [mm] "Aluminium Electrolytic V-Chip SMT Capacitors, 6.3x5.5mm"
  rect 3.5x1.6 smd: 1(-2.8,0) 2(2.8,0)
  silkscreen extent -3.4,-3.4 3.4,3.4, body extent -3.65,-3.3 3.65,3.3, height 5.5
WQFN20_RUK_TEX [mm]
  rrect100% 0.8x0.2 smd mask+0.05: 1(-1.5,0.8) 2(-1.5,0.4) 3(-1.5,0) 4(-1.5,-0.4) 5(-1.5,-0.8) 11(1.5,-0.8) 12(1.5,-0.4) 13(1.5,0) 14(1.5,0.4) 15(1.5,0.8)
  rrect100% 0.2x0.8 smd mask+0.05: 6(-0.8,-1.5) 7(-0.4,-1.5) 8(0,-1.5) 9(0.4,-1.5) 10(0.8,-1.5) 16(0.8,1.5) 17(0.4,1.5) 18(0,1.5) 19(-0.4,1.5) 20(-0.8,1.5)
  rect 0.5x0.5 smd paste-2 mask+0.05: 21(0,0)
  1-Sig/GND region: -0.9,-0.9 0.9,-0.9 0.9,0.9 -0.9,0.9
  silkscreen extent -2.13,-1.68 1.68,1.68, body extent -1.5,-1.5 1.5,1.5, height 0.8
"WSON-6 065" [mm]
  rect 0.7x0.3 smd mask+0.05: 1(-1.05,0.65) 2(-1.05,0) 3(-1.05,-0.65) 4(1.05,-0.65) 5(1.05,0) 6(1.05,0.65)
  rect 0.5x0.5 smd mask+0.05: 7(0,0)
  1-Sig/GND region: -0.5,-0.8 0.5,-0.8 0.5,0.8 -0.5,0.8
  silkscreen extent -1.57,-1.2 1.2,1.2, body extent -1.05,-1.05 1.05,1.05, height 0.8
XDCR_BMI270 [mm]
  rect 0.475x0.25 smd mask+0.05: 1(-1.162,0.75) 2(-1.162,0.25) 3(-1.162,-0.25) 4(-1.162,-0.75) 8(1.162,-0.75) 9(1.162,-0.25) 10(1.162,0.25) 11(1.162,0.75)
  rect 0.25x0.475 smd mask+0.05: 5(-0.5,-0.913) 6(0,-0.913) 7(0.5,-0.913) 12(0.5,0.913) 13(0,0.913) 14(-0.5,0.913)
  silkscreen extent -2.07,-1.33 1.58,1.33, body extent -1.5,-1.25 1.5,1.25, height 0.86
XTAL4_SiT1533_SIT [mm]
  rect 0.4x1.4 smd paste+0 mask+0.05: 1(-0.8,0) 3(0.8,0)
  rect 0.3x0.5 smd paste+0 mask+0.05: 2(-0.099,-0.45) 4(0.106,0.45)
  silkscreen extent -1.5,-0.6 -1.3,-0.4, body extent -1,-0.6 1,0.6, height 0.55

## Part data
C1: "1µF ±10% 16V Ceramic Capacitor X5R 0603 (1608 Metric)", Capacitance=1uF, Case/Package=0603, Case Code (Metric)=1608, Dielectric=X5R, Manuf_1=YAGEO, Manuf_Part_1=CC0603KRX5R7BB105, Manufacturer=Yageo, Max Operating Temperature=85°C, Min Operating Temperature=-55°C, Package Quantity=4000, Supplier Part Number 1=311-1444-1-ND, Tolerance=10%, Voltage Rating=16V, Case Code (Imperial)=0603, ComponentLink1Description=https://www.verical.com/server-webapp/html/getDatasheet?partID=317657&src-supplier=Verical, ComponentLink1URL=https://www.verical.com/server-webapp/html/getDatasheet?partID=317657&src-supplier=Verical, ComponentLink2Description=http://www.yageo.com/documents/recent/UPY-GPHC_X5R_4V-to-50V_25.pdf?src-supplier=Digi-Key, ComponentLink2URL=http://www.yageo.com/documents/recent/UPY-GPHC_X5R_4V-to-50V_25.pdf?src-supplier=Digi-Key, ComponentLink3Description=http://www.farnell.com/datasheets/1525783.pdf?src-supplier=Element14, ComponentLink3URL=http://www.farnell.com/datasheets/1525783.pdf?src-supplier=Element14, ComponentLink4Description=http://www.farnell.com/datasheets/1359354.pdf?src-supplier=Element14, ComponentLink4URL=http://www.farnell.com/datasheets/1359354.pdf?src-supplier=Element14, ComponentLink5Description=http://www.yageo.com/documents/recent/UPY-GPHC_X5R_4V-to-50V_12.pdf?src-supplier=Avnet, ComponentLink5URL=http://www.yageo.com/documents/recent/UPY-GPHC_X5R_4V-to-50V_12.pdf?src-supplier=Avnet, Composition=Ceramic, Depth=0.8mm, Dissipation Factor=7%, Halogen Free="Halogen Free", Height=0.8mm, Lead Free="Lead Free", Length=1.6mm, Manufacturer Part Number=CC0603KRX5R7BB105, Mount="Surface Mount", Number of Pins=2, Order=CC0603KRX5R7BB105, Packaging="Tape and Reel", Pricing 1="1=0.11, 10=0.081, 100=0.0382, 500=0.0268, 1000=0.0222 (USD)", Radiation Hardening=No, REACH SVHC=Unknown, Revision="July-2002: Re-released for DXP Platform.", Stock 1=2299176, Supplier 1=Digi-Key, Termination=SMD/SMT, Thickness=0.035inch, Voltage Rating (DC)=16V, Width=0.8mm
C2: "0.047µF ±10% 50V Ceramic Capacitor X7R 0402 (1005 Metric)", Capacitance=47nF, Case/Package=0402, Case Code (Metric)=1005, Dielectric=X7R, Manufacturer=TDK, Manufacturer Part Number=CGA2B3X7R1H473K050BB, Max Operating Temperature=125°C, Min Operating Temperature=-55°C, Package Quantity=1, Ratings=AEC-Q200, Supplier Part Number 1=445-6897-1-ND, Tolerance=10%, Voltage Rating=50V, Case Code (Imperial)=0402, ComponentLink1Description=http://www.farnell.com/datasheets/1807242.pdf?src-supplier=Element14, ComponentLink1URL=http://www.farnell.com/datasheets/1807242.pdf?src-supplier=Element14, ComponentLink2Description=http://www.farnell.com/datasheets/1735392.pdf?src-supplier=Element14, ComponentLink2URL=http://www.farnell.com/datasheets/1735392.pdf?src-supplier=Element14, ComponentLink3Description=http://www.mouser.com/ds/2/400/lcc_automotive_general_en-843974.pdf?src-supplier=Mouser, ComponentLink3URL=http://www.mouser.com/ds/2/400/lcc_automotive_general_en-843974.pdf?src-supplier=Mouser, Composition=Ceramic, Depth=0.5mm, Height=0.5mm, Lead Free="Lead Free", Length=1mm, Mount="Surface Mount", Packaging="Tape and Reel", Pricing 1="1=0.11, 10=0.083, 50=0.045, 100=0.0368, 500=0.0263, 1000=0.0207, 2500=0.0188, 5000=0.0173 (USD)", Radiation Hardening=No, REACH SVHC="No SVHC", Stock 1=1255429, Supplier 1=Digi-Key, Termination=SMD/SMT, Thickness=0.022inch, Voltage Rating (DC)=50V, Weight=2.3E-05oz, Width=0.02inch
C3: "4.7µF ±10% 10V Ceramic Capacitor X5R 0603 (1608 Metric)", Capacitance=4.7uF, Case/Package=0603, Case Code (Metric)=1608, Dielectric=X5R, Manufacturer=Yageo, Manufacturer Part Number=CC0603KRX5R6BB475, Max Operating Temperature=85°C, Min Operating Temperature=-55°C, Package Quantity=1, Supplier Part Number 1=311-1455-1-ND, Tolerance=10%, Voltage Rating=10V, Case Code (Imperial)=0603, ComponentLink1Description=http://www.farnell.com/datasheets/2167237.pdf?src-supplier=Element14, ComponentLink1URL=http://www.farnell.com/datasheets/2167237.pdf?src-supplier=Element14, ComponentLink2Description=http://www.yageo.com/documents/recent/UPY-GPHC_X5R_4V-to-50V_25.pdf?src-supplier=Digi-Key, ComponentLink2URL=http://www.yageo.com/documents/recent/UPY-GPHC_X5R_4V-to-50V_25.pdf?src-supplier=Digi-Key, ComponentLink3Description=http://www.yageo.com/documents/recent/UPY-GPHC_X5R_4V-to-50V_12.pdf?src-supplier=Avnet, ComponentLink3URL=http://www.yageo.com/documents/recent/UPY-GPHC_X5R_4V-to-50V_12.pdf?src-supplier=Avnet, ComponentLink4Description=http://www.yageo.com/documents/recent/UPY-GPHC_X5R_4V-to-50V_12.pdf?src-supplier=Avnet+Europe, ComponentLink4URL=http://www.yageo.com/documents/recent/UPY-GPHC_X5R_4V-to-50V_12.pdf?src-supplier=Avnet+Europe, Composition=Ceramic, Depth=0.8mm, Halogen Free="Halogen Free", Height=0.8mm, Lead Free="Lead Free", Length=1.6mm, Mount="Surface Mount", Packaging="Tape and Reel", Pricing 1="1=0.26, 10=0.18, 100=0.102, 500=0.072, 1000=0.063 (USD)", Radiation Hardening=No, REACH SVHC=Unknown, Stock 1=325858, Supplier 1=Digi-Key, Termination=SMD/SMT, Thickness=0.035inch, Voltage Rating (DC)=10V, Width=0.8mm
C4: "10µF ±10% 25V Ceramic Capacitor X7R 1206 (3216 Metric)", Capacitance=10uF, Case/Package=1206, Case Code (Metric)=3216, Dielectric=X7R, Manufacturer=Yageo, Manufacturer Part Number=CC1206KKX7R8BB106, Max Operating Temperature=125°C, Min Operating Temperature=-55°C, Supplier Part Number 1=311-1959-1-ND, Tolerance=10%, Voltage Rating=25V, Case Code (Imperial)=1206, ComponentLink1Description=http://www.yageo.com/documents/recent/UPY-GPHC_X7R_6.3V-to-50V_8.pdf?src-supplier=Avnet, ComponentLink1URL=http://www.yageo.com/documents/recent/UPY-GPHC_X7R_6.3V-to-50V_8.pdf?src-supplier=Avnet, ComponentLink2Description=http://www.mouser.com/ds/2/447/Yageo_UPY-GP_NP0_16V-to-50V_9-358835.pdf?src-supplier=Mouser, ComponentLink2URL=http://www.mouser.com/ds/2/447/Yageo_UPY-GP_NP0_16V-to-50V_9-358835.pdf?src-supplier=Mouser, ComponentLink3Description=http://components.arrow.com/part/dataview/0323_04166677?src-supplier=Arrow+Europe, ComponentLink3URL=http://components.arrow.com/part/dataview/0323_04166677?src-supplier=Arrow+Europe, ComponentLink4Description=http://www.yageo.com/documents/recent/UPY-GPHC_X7R_6.3V-to-50V_18.pdf?src-supplier=Digi-Key, ComponentLink4URL=http://www.yageo.com/documents/recent/UPY-GPHC_X7R_6.3V-to-50V_18.pdf?src-supplier=Digi-Key, ComponentLink5Description=http://www.yageo.com/documents/recent/UPY-GPHC_X7R_6.3V-to-50V_9.pdf?src-supplier=Future+Electronics, ComponentLink5URL=http://www.yageo.com/documents/recent/UPY-GPHC_X7R_6.3V-to-50V_9.pdf?src-supplier=Future+Electronics, Composition=Ceramic, Depth=1.6mm, Halogen Free="Halogen Free", Lead Free="Lead Free", Length=3.2mm, Mount="Surface Mount", Packaging="Tape and Reel", Pricing 1="1=0.49, 10=0.348, 50=0.2632, 100=0.2293, 500=0.1698, 1000=0.1444 (USD)", Radiation Hardening=No, Stock 1=3990, Supplier 1=Digi-Key, Termination=SMD/SMT, Thickness=0.071inch, Voltage Rating (DC)=25V, Weight=0.000571oz, Width=1.6mm
C5 C6 C7 C8 C49 C90 C107: "Capacitor,10uF,10V,X7R,10%,0805,Murata", Capacitance=10uF, Case/Package=0805, Case Code (Metric)=2012, Dielectric=X7R, Manufacturer=Murata, Manufacturer Part Number=GRM21BR71A106KA73L, Max Operating Temperature=125°C, Min Operating Temperature=-55°C, Package Quantity=3000, Supplier Part Number 1=490-10516-1-ND, Tolerance=10%, Voltage Rating=10V, Case Code (Imperial)=0805, ComponentLink1Description=http://components.arrow.com/part/dataview/0323_07281730?src-supplier=Arrow+Europe, ComponentLink1URL=http://components.arrow.com/part/dataview/0323_07281730?src-supplier=Arrow+Europe, ComponentLink2Description=http://www.mouser.com/ds/2/281/c02e-2905.pdf?src-supplier=Mouser, ComponentLink2URL=http://www.mouser.com/ds/2/281/c02e-2905.pdf?src-supplier=Mouser, ComponentLink3Description=http://www.farnell.com/datasheets/2079188.pdf?src-supplier=Newark, ComponentLink3URL=http://www.farnell.com/datasheets/2079188.pdf?src-supplier=Newark, ComponentLink4Description=http://www.farnell.com/datasheets/2079188.pdf?src-supplier=Farnell, ComponentLink4URL=http://www.farnell.com/datasheets/2079188.pdf?src-supplier=Farnell, ComponentLink5Description=http://www.farnell.com/datasheets/2079188.pdf?src-supplier=Element14, ComponentLink5URL=http://www.farnell.com/datasheets/2079188.pdf?src-supplier=Element14, ComponentLink6Description=http://search.murata.co.jp/Ceramy/image/img/A01X/G101/ENG/GRM21BR71A106KA73-01.pdf?src-supplier=Digi-Key, ComponentLink6URL=http://search.murata.co.jp/Ceramy/image/img/A01X/G101/ENG/GRM21BR71A106KA73-01.pdf?src-supplier=Digi-Key, Depth=1.25mm, Height=1.25mm, Length=2mm, Mount="Surface Mount", Packaging="Tape and Reel", Pricing 1="1=0.26, 10=0.176, 100=0.089, 500=0.0609, 1000=0.0538 (USD)", REACH SVHC="No SVHC", Stock 1=2099435, Supplier 1=Digi-Key, Termination=SMD/SMT, Thickness=0.055inch, Voltage Rating (DC)=10V, Weight=0.000335oz, Width=1.25mm
C9 C10 C11: "68µF 25V Aluminum Electrolytic Capacitors Radial, Can - SMD  2000 Hrs @ 105°C", Capacitance=68uF, Capacitance Tolerance=+/-20%, Leakage Current=17uA, Manufacturer="Wurth Elektronik", Manufacturer Part Number=865080443009, Operating Temperature="-55 to +105degC", Rated Voltage=25V, Ripple Current=240mA, Supplier Part Number 1=732-8437-1-ND, ComponentLink1Description=Manufacturer, ComponentLink1URL=http://www.we-online.de, ComponentLink2Description=Datasheet, ComponentLink2URL=https://www.we-online.com/catalog/datasheet/865080443009.pdf, Diameter=6.3mm, Dissipation Factor=14%, Endurance=2000h, Height=5.5mm, Mount="Surface Mount", Mounting Technology=SMT, Packaging="Tape and Reel", Published Date="May 2020", Supplier 1=Digi-Key, Technical Reference=ASED055680M025DVCTBB000
C12 C101 C102 C124 C125 C127 C128 C134 C137 C138 C140 C141 C143 C144: "10µF ±10% 16V Ceramic Capacitor X5R 0603 (1608 Metric)", Capacitance=10uF, Case/Package=0603, Case Code (Metric)=1608, Dielectric=X5R, Manufacturer=Murata, Manufacturer Part Number=GRM188R61C106KAALJ, Max Operating Temperature=85°C, Min Operating Temperature=-55°C, Package Quantity=10000, Supplier Part Number 1=490-12736-1-ND, Tolerance=10%, Voltage Rating=16V, Case Code (Imperial)=0603, Composition=Ceramic, Height=0.8mm, Length=0.063inch, Mount="Surface Mount", Packaging="Tape and Reel", Pricing 1="1=0.39, 10=0.271, 100=0.1628, 500=0.1221, 1000=0.1031, 2500=0.0977, 5000=0.0923 (USD)", Stock 1=5470, Supplier 1=Digi-Key, Termination=SMD/SMT, Thickness=0.037inch, Voltage Rating (DC)=16V, Weight=0.000222oz, Width=0.031inch
C13 C68 C69 C103 C122: "0.1µF ±10% 16V Ceramic Capacitor X7R 0402 (1005 Metric)", Capacitance=100nF, Case Code (Imperial)=0402, Case Code (Metric)=1005, Dielectric=X7R, Manufacturer=Yageo, Manufacturer Part Number=CC0402KRX7R7BB104, Max Operating Temperature=125°C, Min Operating Temperature=-55°C, Package Quantity=1, Supplier Part Number 1=311-1338-1-ND, Tolerance=10%, Voltage=16V, ComponentLink1Description=http://www.yageo.com/documents/recent/UPY-GPHC_X7R_6.3V-to-50V_8.pdf?src-supplier=Avnet+Europe, ComponentLink1URL=http://www.yageo.com/documents/recent/UPY-GPHC_X7R_6.3V-to-50V_8.pdf?src-supplier=Avnet+Europe, ComponentLink2Description=http://www.yageo.com/documents/recent/UPY-GPHC_X7R_6.3V-to-50V_18.pdf?src-supplier=Digi-Key, ComponentLink2URL=http://www.yageo.com/documents/recent/UPY-GPHC_X7R_6.3V-to-50V_18.pdf?src-supplier=Digi-Key, ComponentLink3Description=http://www.yageo.com/documents/recent/UPY-GPHC_X7R_6.3V-to-50V_8.pdf?src-supplier=Avnet, ComponentLink3URL=http://www.yageo.com/documents/recent/UPY-GPHC_X7R_6.3V-to-50V_8.pdf?src-supplier=Avnet, ComponentLink4Description=http://www.yageo.com/documents/recent/UPY-GPHC_X7R_6.3V-to-50V_18.pdf?src-supplier=Mouser, ComponentLink4URL=http://www.yageo.com/documents/recent/UPY-GPHC_X7R_6.3V-to-50V_18.pdf?src-supplier=Mouser, ComponentLink5Description=http://www.farnell.com/datasheets/2167236.pdf?src-supplier=Element14, ComponentLink5URL=http://www.farnell.com/datasheets/2167236.pdf?src-supplier=Element14, ComponentLink6Description=http://www.farnell.com/datasheets/1489800.pdf?src-supplier=Element14, ComponentLink6URL=http://www.farnell.com/datasheets/1489800.pdf?src-supplier=Element14, Composition=Ceramic, Depth=0.5mm, Halogen Free="Halogen Free", Height=0.5mm, Lead Free="Lead Free", Length=1mm, Mount="Surface Mount", Number of Pins=2, Order=CC0402KRX7R7BB104, Packaging="Tape and Reel", Pricing 1="1=0.1, 10=0.031, 100=0.0136, 500=0.0097, 1000=0.0077, 2500=0.007, 5000=0.0064 (USD)", Radiation Hardening=No, REACH SVHC="No SVHC", Revision="July-2002: Re-released for DXP Platform.", Stock 1=25916830, Supplier 1=Digi-Key, Termination=SMD/SMT, Thickness=0.022inch, Voltage Rating=16V, Voltage Rating (DC)=16V, Width=0.02inch